# Allegro board cranberry_board.brd
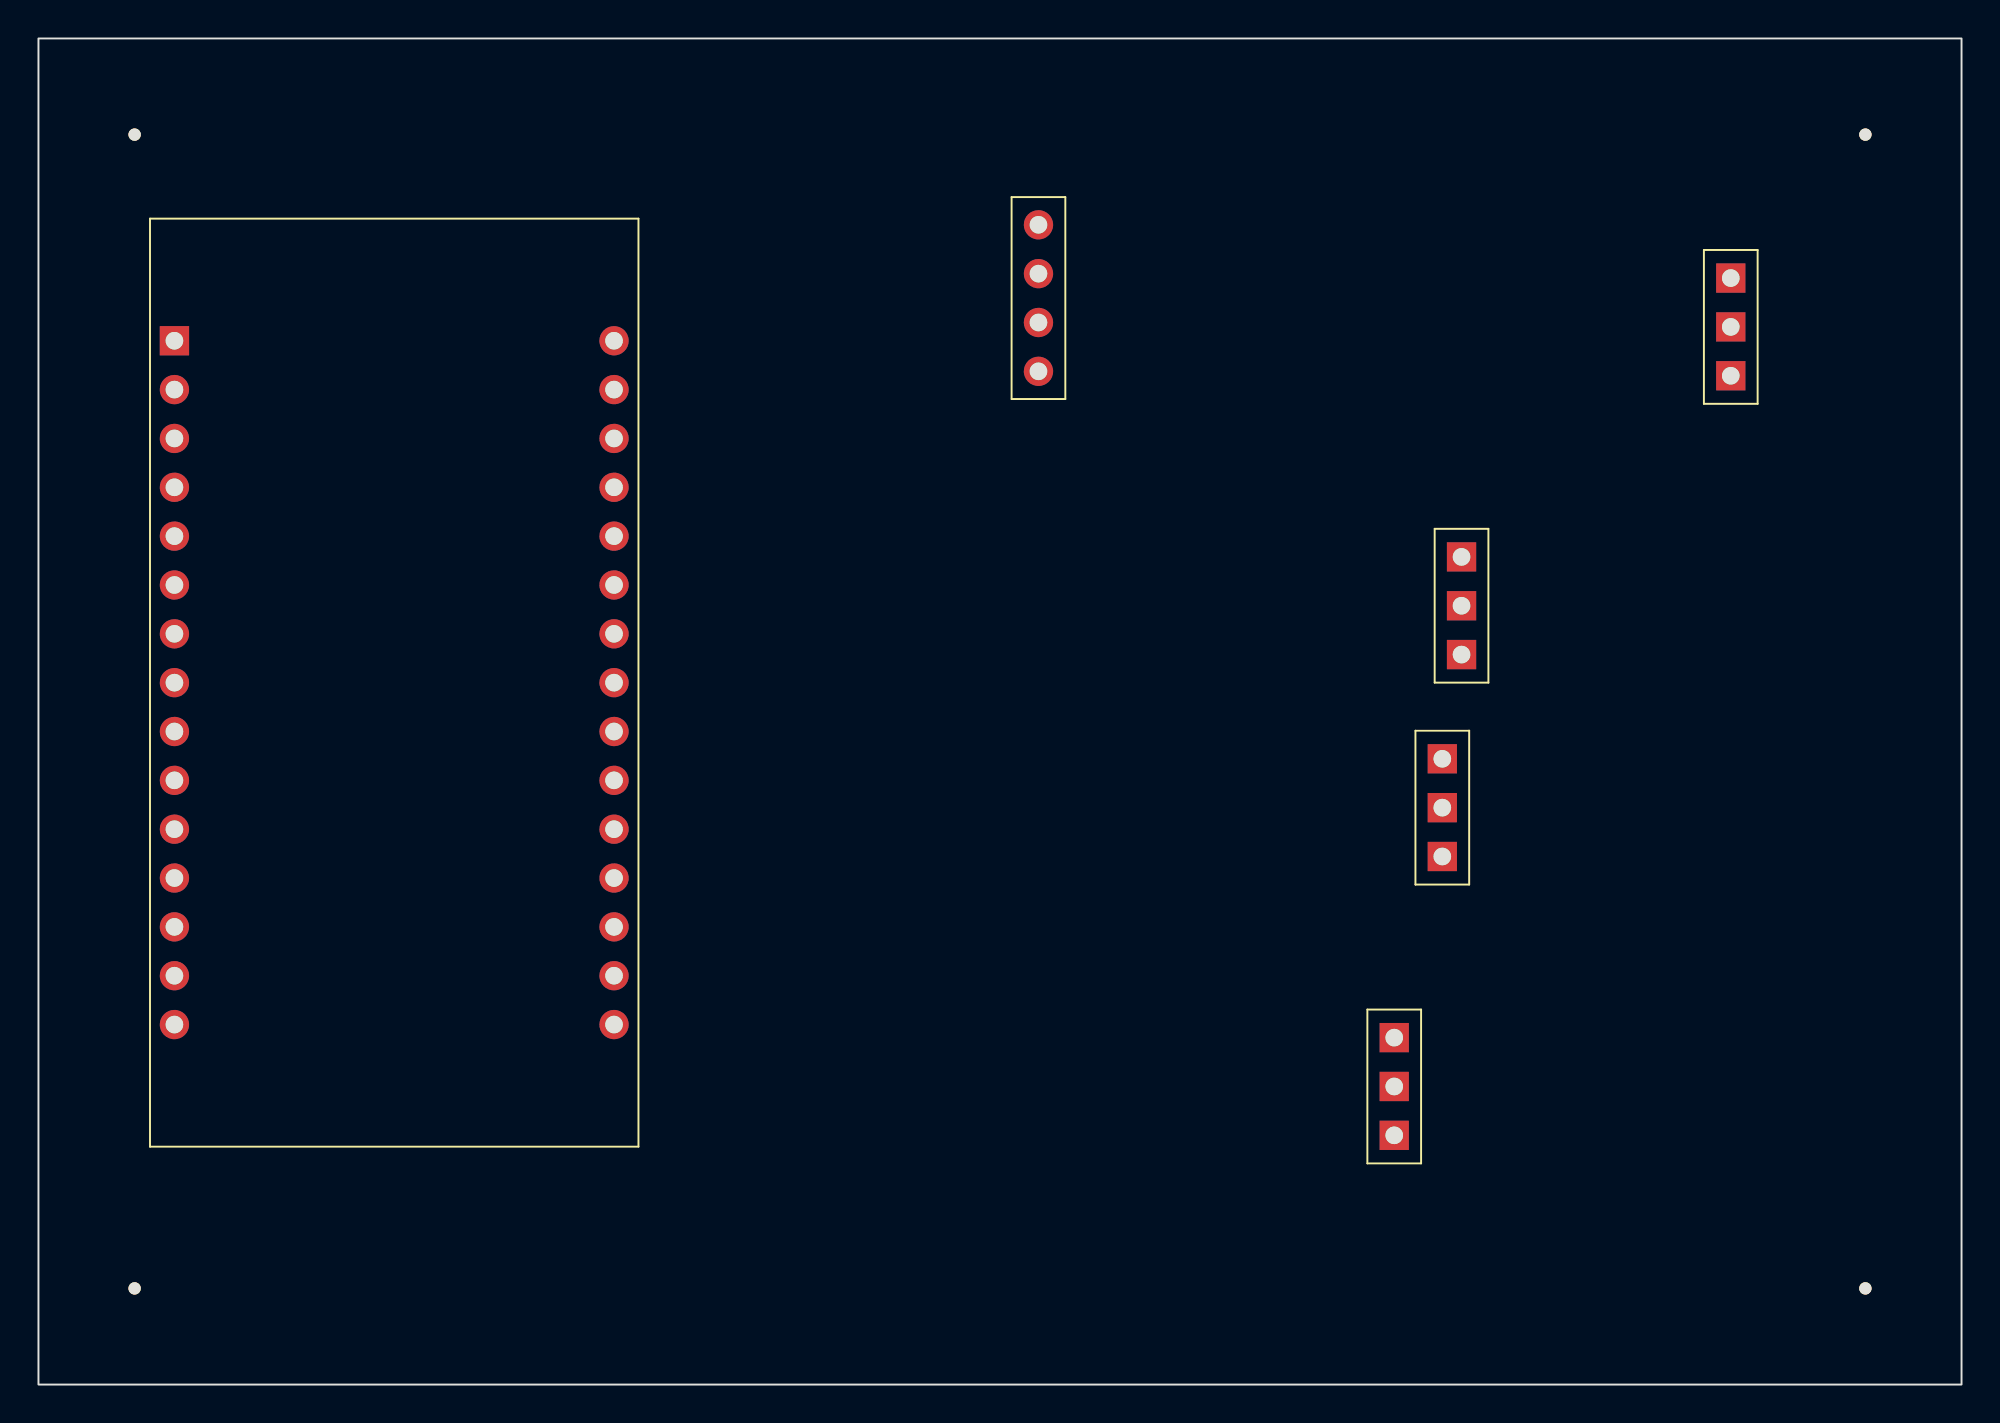
[diagram p0: board, top side]
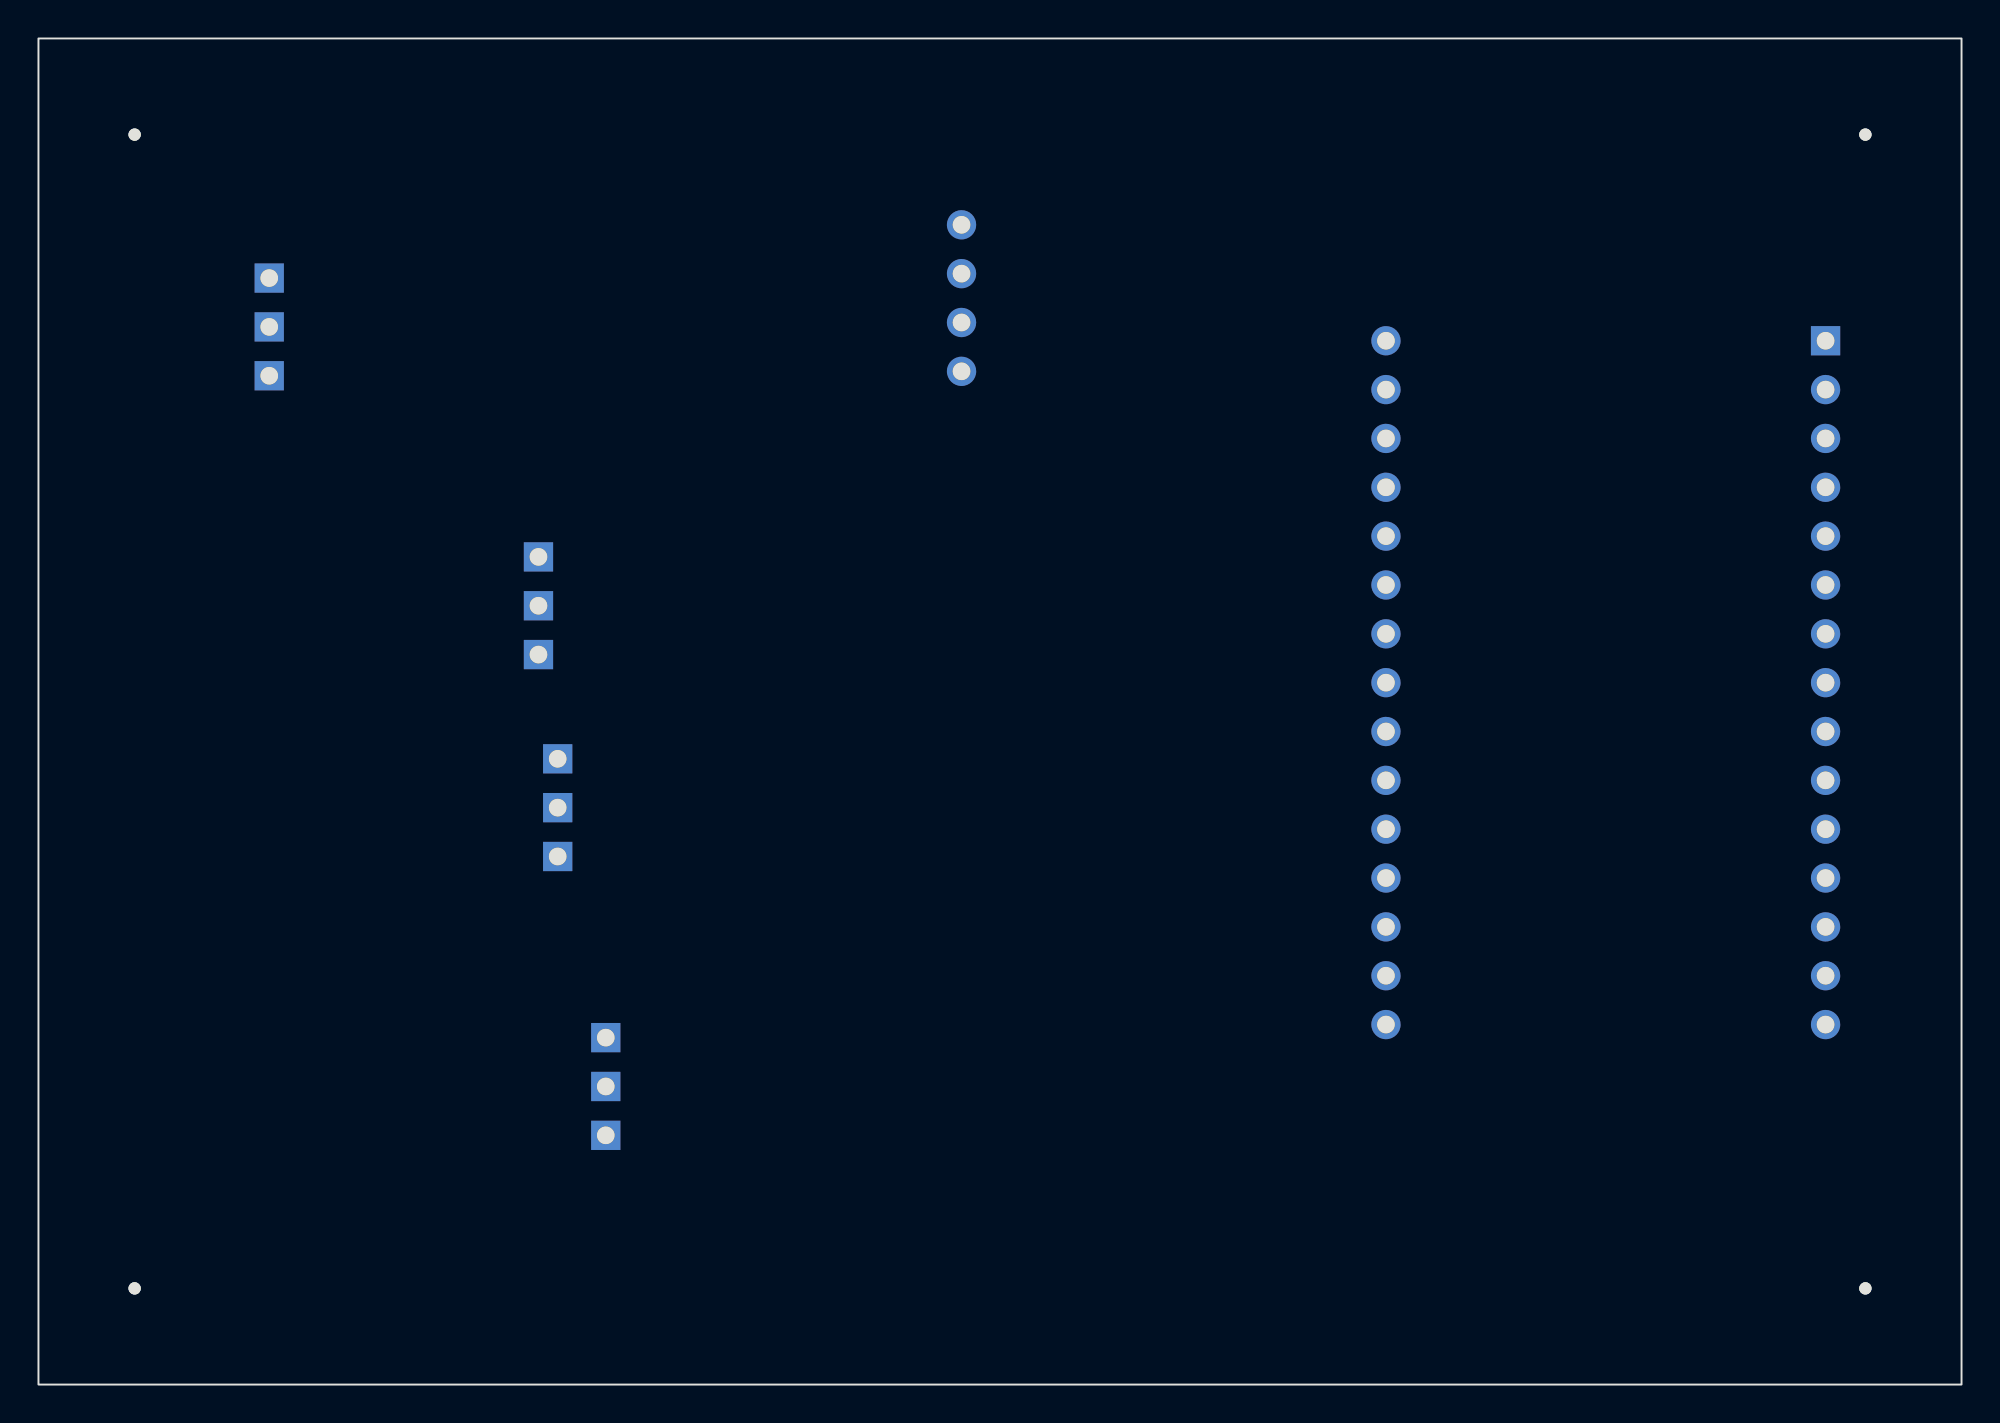
[diagram p1: board, bottom side, seen from below]

Outline 100 x 70 mm; copper layers: TOP, BOTTOM. Coordinates in mm from the lower left corner of the outline.
Outline path: rectangle 0,0 100,70

## Design rules (mm)
constraint set DEFAULT: min track width 0.127

## Placement (name value [footprint] x y rotation side)
NOREF  -  []  5 65 0 top
NOREF#2  -  []  5 5 90 top
NOREF#3  -  [unnamed#2]  5 5 0 top
NOREF#4  -  [unnamed#2]  95 5 0 top
NOREF#5  -  []  0 0 90 top
NOREF#6  -  [unnamed#2]  95 65 0 top
NOREF#7  -  []  0 65 0 top
NOREF#8  -  [unnamed#2]  5 65 0 top
NOREF#9  -  []  0 70 0 top
NOREF#10  -  []  5 0 90 top
S1  AM2302  [DHT22]  52 56.5 0 top
U1  KY-022  [REL01]  88 55 0 top
U2  ESP-12E  [ESP12]  18.5 36.5 0 top
U3  RELAY  [REL01]  74 40.5 0 top
U4  RELAY  [REL01]  73 30 0 top
U5  MOTION_SENSOR  [REL01]  70.5 15.5 0 top

## Library data of the parts
S1 = AM2302
U1 = KY-022
U2 = NODEMCU
U3 U4 = RELAY
U5 = MOTION_SENSOR

## Footprints (pads in the part's own frame, mm; a bottom-side part is the same pattern mirrored in y, then rotated)
DHT22
  round 1.524 hole 0.914: 1(0,3.81) 2(0,1.27) 3(0,-1.27) 4(0,-3.81)
ESP12
  rect 1.524x1.524 hole 0.914: 1(-11.43,17.78)
  round 1.524 hole 0.914: 2(-11.43,15.24) 3(-11.43,12.7) 4(-11.43,10.16) 5(-11.43,7.62) 6(-11.43,5.08) 7(-11.43,2.54) 8(-11.43,0) 9(-11.43,-2.54) 10(-11.43,-5.08) 11(-11.43,-7.62) 12(-11.43,-10.16) 13(-11.43,-12.7) 14(-11.43,-15.24) 15(-11.43,-17.78) 16(11.43,-17.78) 17(11.43,-15.24) 18(11.43,-12.7) 19(11.43,-10.16) 20(11.43,-7.62) 21(11.43,-5.08) 22(11.43,-2.54) 23(11.43,0) 24(11.43,2.54) 25(11.43,5.08) 26(11.43,7.62) 27(11.43,10.16) 28(11.43,12.7) 29(11.43,15.24) 30(11.43,17.78)
REL01
  rect 1.524x1.524 hole 0.914: 1(0,2.54) 2(0,0) 3(0,-2.54)
unnamed#2
  round 0.635 hole 3.175 unplated: (0,0)

## Nets
N01765: S1.1(VCC) U1.1(VCC) U2.15(VIN) U3.1(VCC) U4.1(VCC) U5.1(VCC)
N01804: S1.4 U1.3 U2.22 U3.3 U4.3 U5.3
N01962: U2.23 U4.2
N02077: U1.2 U2.19
N03160: U2.24 U5.2
N06744: S1.2 U2.18
N06751: U2.20 U3.2

Pads without a net: S1 3; U2 1 2 3 4 5 6 7 8 9 10 11 12 13 14 16 17 21 25 26 27 28 29 30
